# EAGLE board Expansion Port (EAGLE 9.6.2)
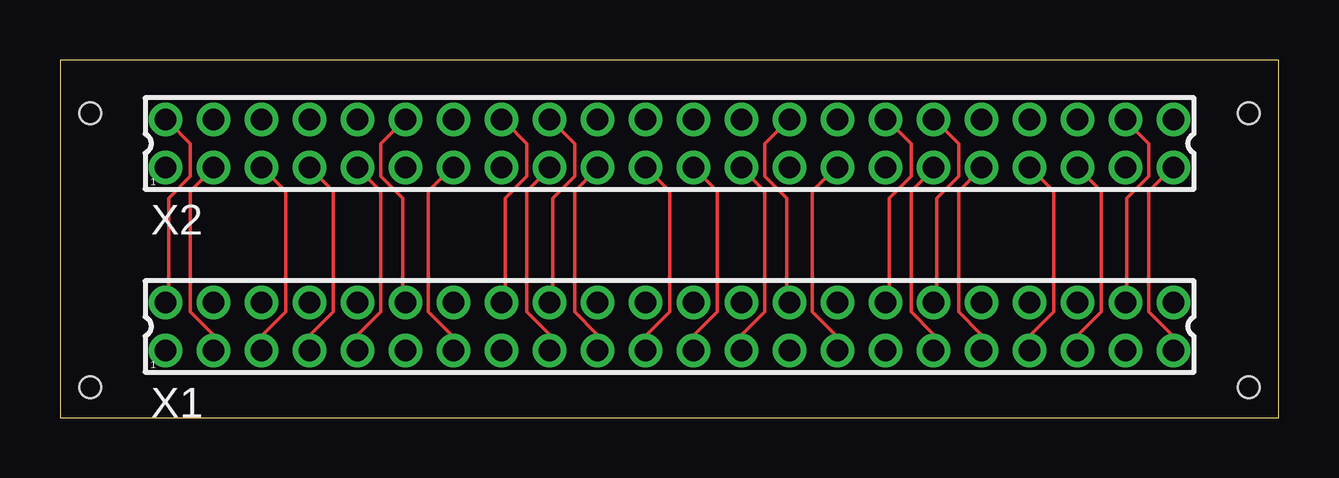
[diagram p0: board, top side]
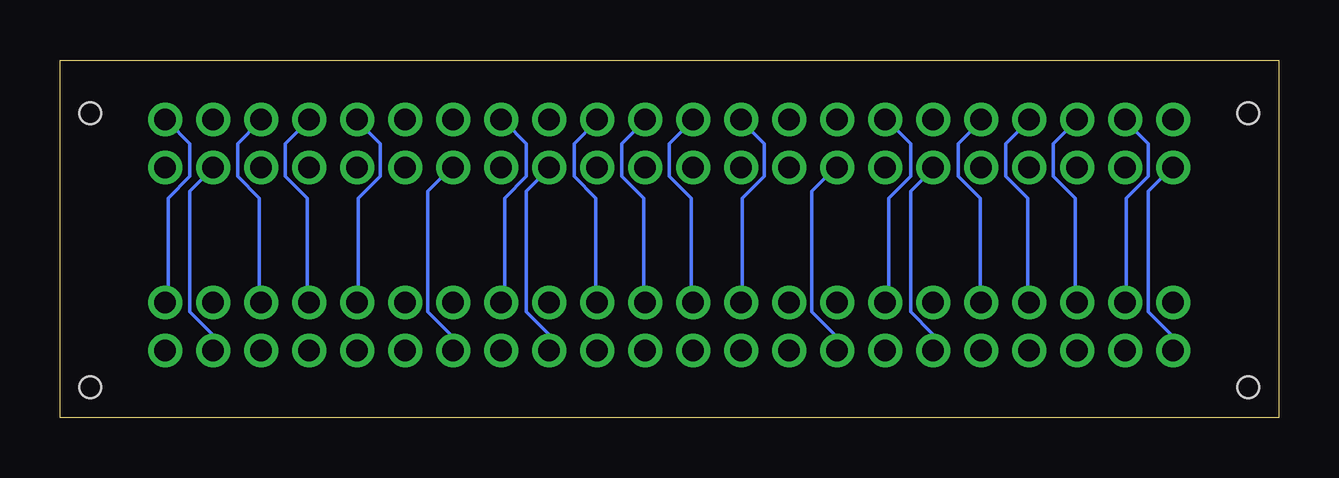
[diagram p1: board, bottom side, seen from below]

Size 50.78 x 14.91 mm. Coordinates in mm from the lower left corner, seen from the top.
Outline: 0,0 50.78,0 50.78,14.91 0,14.91 0,0
Copper layers (1*16): Top 0.035mm / dielectric 1.5mm / Bottom 0.035mm
Design rules "default": minimum track width 6mil, minimum drill 0.35mm, track to track 6mil, track to pad 6mil, pad to pad 6mil, via to via 6mil, smd to smd 6mil, copper to edge 40mil, drill to drill 6mil, minimum pad ring 10mil, minimum via ring 8mil, stop-mask expansion 4mil, vias tented up to drill 0mil, thermal gap 10mil
Holes 0.9 mm at 1.27,12.7 1.27,1.27 49.53,12.7 49.53,1.27

## Footprints (pad centres in the part's own frame; a part is rotated, then mirrored left to right if it is on the bottom)
87758-4416 = drill 0.9 pad 1.27: 1 -21,-1; 2 -21,1; 3 -19,-1; 4 -19,1; 5 -17,-1; 6 -17,1; 7 -15,-1; 8 -15,1; 9 -13,-1; 10 -13,1; 11 -11,-1; 12 -11,1; 13 -9,-1; 14 -9,1; 15 -7,-1; 16 -7,1; 17 -5,-1; 18 -5,1; 19 -3,-1; 20 -3,1; 21 -1,-1; 22 -1,1; 23 1,-1; 24 1,1; 25 3,-1; 26 3,1; 27 5,-1; 28 5,1; 29 7,-1; 30 7,1; 31 9,-1; 32 9,1; 33 11,-1; 34 11,1; 35 13,-1; 36 13,1; 37 15,-1; 38 15,1; 39 17,-1; 40 17,1; 41 19,-1; 42 19,1; 43 21,-1; 44 21,1

## Placement (x,y rotation side)
X1  87758-4416  [87758-4416]  25.4,3.81 0 top
X2  87758-4416  [87758-4416]  25.4,11.43 0 top

## Library data of the parts
X1 X2 = con-molex; MF: MOLEX; MPN: 87758-4416; OC_FARNELL: unknown; OC_NEWARK: 59J1588

## Nets
N$1: X1.1 X2.1
N$2: X1.3 X2.3
N$3: X1.5 X2.5
N$4: X1.7 X2.7
N$5: X1.9 X2.9
N$6: X1.11 X2.11
N$7: X1.13 X2.13
N$8: X1.15 X2.15
N$9: X1.17 X2.17
N$10: X1.19 X2.19
N$11: X1.21 X2.21
N$12: X1.23 X2.23
N$13: X1.25 X2.25
N$14: X1.27 X2.27
N$15: X1.29 X2.29
N$16: X1.31 X2.31
N$17: X1.33 X2.33
N$18: X1.35 X2.35
N$19: X1.37 X2.37
N$20: X1.39 X2.39
N$21: X1.41 X2.41
N$22: X1.43 X2.43
N$23: X1.2 X2.2
N$24: X1.4 X2.4
N$25: X1.6 X2.6
N$26: X1.8 X2.8
N$27: X1.10 X2.10
N$28: X1.12 X2.12
N$29: X1.14 X2.14
N$30: X1.16 X2.16
N$31: X1.18 X2.18
N$32: X1.20 X2.20
N$33: X1.22 X2.22
N$34: X1.24 X2.24
N$35: X1.26 X2.26
N$36: X1.28 X2.28
N$37: X1.30 X2.30
N$38: X1.32 X2.32
N$39: X1.34 X2.34
N$40: X1.36 X2.36
N$41: X1.38 X2.38
N$42: X1.40 X2.40
N$43: X1.42 X2.42
N$44: X1.44 X2.44

## Tracks (layer width: path | path; a pad name or v marks a point on that pad's centre or on a via)
N$1
  Bottom 0.152: X1.1 4.52,2.9 4.52,3.5 5.44,4.42 5.44,9.45 4.52,10.36 X2.1
N$2
  Top 0.152: X1.3 6.35,2.9 6.35,3.5 5.44,4.42 5.44,9.45 6.35,10.36 X2.3
N$3
  Top 0.152: X1.5 8.48,2.9 8.48,3.5 9.4,4.42 9.4,9.45 8.48,10.36 X2.5
N$4
  Top 0.152: X1.7 10.46,2.9 10.46,3.5 11.38,4.42 11.38,9.45 10.46,10.36 X2.7
N$5
  Top 0.152: X1.9 12.45,2.9 12.45,3.5 13.36,4.42 13.36,9.45 12.45,10.36 X2.9
N$6
  Bottom 0.152: X1.11 14.43,2.9 14.43,3.5 15.34,4.42 15.34,9.45 14.43,10.36 X2.11
N$7
  Top 0.152: X1.13 16.26,2.9 16.26,3.5 15.34,4.42 15.34,9.45 16.26,10.36 X2.13
N$8
  Bottom 0.152: X1.15 18.54,2.9 18.54,3.5 19.46,4.42 19.46,9.45 18.54,10.36 X2.15
N$9
  Top 0.152: X1.17 20.37,2.9 20.37,3.5 19.46,4.42 19.46,9.45 20.37,10.36 X2.17
N$10
  Top 0.152: X1.19 22.35,2.9 22.35,3.5 21.44,4.42 21.44,9.45 22.35,10.36 X2.19
N$11
  Top 0.152: X1.21 24.49,2.9 24.49,3.5 25.4,4.42 25.4,9.45 24.49,10.36 X2.21
N$12
  Top 0.152: X2.23 27.38,9.45 27.38,4.42 26.47,3.5 26.47,2.9 X1.23
N$13
  Top 0.152: X1.25 28.45,2.9 28.45,3.5 29.36,4.42 29.36,9.45 28.45,10.36 X2.25
N$14
  Bottom 0.152: X1.27 30.43,2.9 30.43,3.5 31.34,4.42 31.34,9.45 30.43,10.36 X2.27
N$15
  Top 0.152: X1.29 32.26,2.9 32.26,3.5 31.34,4.42 31.34,9.45 32.26,10.36 X2.29
N$16
  Bottom 0.152: X1.31 34.54,2.9 34.54,3.5 35.46,4.42 35.46,9.45 34.54,10.36 X2.31
N$17
  Top 0.152: X1.33 36.37,2.9 36.37,3.5 35.46,4.42 35.46,9.45 36.37,10.36 X2.33
N$18
  Top 0.152: X1.35 38.35,2.9 38.35,3.5 37.44,4.42 37.44,9.45 38.35,10.36 X2.35
N$19
  Top 0.152: X1.37 40.49,2.9 40.49,3.5 41.4,4.42 41.4,9.45 40.49,10.36 X2.37
N$20
  Top 0.152: X1.39 42.47,2.9 42.47,3.5 43.38,4.42 43.38,9.45 42.47,10.36 X2.39
N$21
  Bottom 0.152: X1.41 44.45,2.9 44.45,3.5 45.36,4.42 45.36,9.45 44.45,10.36 X2.41
N$22
  Top 0.152: X1.43 46.28,2.9 46.28,3.5 45.36,4.42 45.36,9.45 46.28,10.36 X2.43
N$23
  Top 0.152: X1.2 4.52,4.88 4.52,9.14 5.44,10.06 5.44,11.43 4.52,12.34 X2.2
N$24
  Bottom 0.152: X1.4 6.35,4.88 6.35,9.14 5.44,10.06 5.44,11.43 6.35,12.34 X2.4
N$25
  Bottom 0.152: X1.6 8.48,4.88 8.48,9.14 9.4,10.06 9.4,11.43 8.48,12.34 X2.6
N$26
  Bottom 0.152: X1.8 10.46,4.88 10.46,9.14 11.38,10.06 11.38,11.43 10.46,12.34 X2.8
N$27
  Bottom 0.152: X1.10 12.45,4.88 12.45,9.14 13.36,10.06 13.36,11.43 12.45,12.34 X2.10
N$28
  Top 0.152: X1.12 14.28,4.88 14.28,9.14 13.36,10.06 13.36,11.43 14.28,12.34 X2.12
N$29
  Bottom 0.152: X1.14 16.26,4.88 16.26,9.14 15.34,10.06 15.34,11.43 16.26,12.34 X2.14
N$30
  Top 0.152: X1.16 18.54,4.88 18.54,9.14 19.46,10.06 19.46,11.43 18.54,12.34 X2.16
N$31
  Top 0.152: X1.18 20.52,4.88 20.52,9.14 21.44,10.06 21.44,11.43 20.52,12.34 X2.18
N$32
  Bottom 0.152: X1.20 22.35,4.88 22.35,9.14 21.44,10.06 21.44,11.43 22.35,12.34 X2.20
N$33
  Bottom 0.152: X2.22 25.4,11.43 25.4,10.06 24.49,9.14 24.49,4.88 X1.22
N$34
  Bottom 0.152: X1.24 26.47,4.88 26.47,9.14 27.38,10.06 27.38,11.43 26.47,12.34 X2.24
N$35
  Bottom 0.152: X1.26 28.45,4.88 28.45,9.14 29.36,10.06 29.36,11.43 28.45,12.34 X2.26
N$36
  Top 0.152: X1.28 30.28,4.88 30.28,9.14 29.36,10.06 29.36,11.43 30.28,12.34 X2.28
N$37
  Bottom 0.152: X1.30 32.26,4.88 32.26,9.14 31.34,10.06 31.34,11.43 32.26,12.34 X2.30
N$38
  Top 0.152: X1.32 34.54,4.88 34.54,9.14 35.46,10.06 35.46,11.43 34.54,12.34 X2.32
N$39
  Top 0.152: X1.34 36.52,4.88 36.52,9.14 37.44,10.06 37.44,11.43 36.52,12.34 X2.34
N$40
  Bottom 0.152: X1.36 38.35,4.88 38.35,9.14 37.44,10.06 37.44,11.43 38.35,12.34 X2.36
N$41
  Bottom 0.152: X1.38 40.49,4.88 40.49,9.14 41.4,10.06 41.4,11.43 40.49,12.34 X2.38
N$42
  Bottom 0.152: X1.40 42.47,4.88 42.47,9.14 43.38,10.06 43.38,11.43 42.47,12.34 X2.40
N$43
  Top 0.152: X1.42 44.45,4.88 44.45,9.14 45.36,10.06 45.36,11.43 44.45,12.34 X2.42
N$44
  Bottom 0.152: X1.44 46.28,4.88 46.28,9.14 45.36,10.06 45.36,11.43 46.28,12.34 X2.44